# Altium PCB Status_PCB.PcbDoc
Units mm, origin at the board's own origin, x right, y up, seen from the top; angles counter-clockwise.
Board outline 102 x 42 mm, 2 copper layers (Top Layer, Bottom Layer); 18 components, 21 nets, 58 pads, 0 vias.
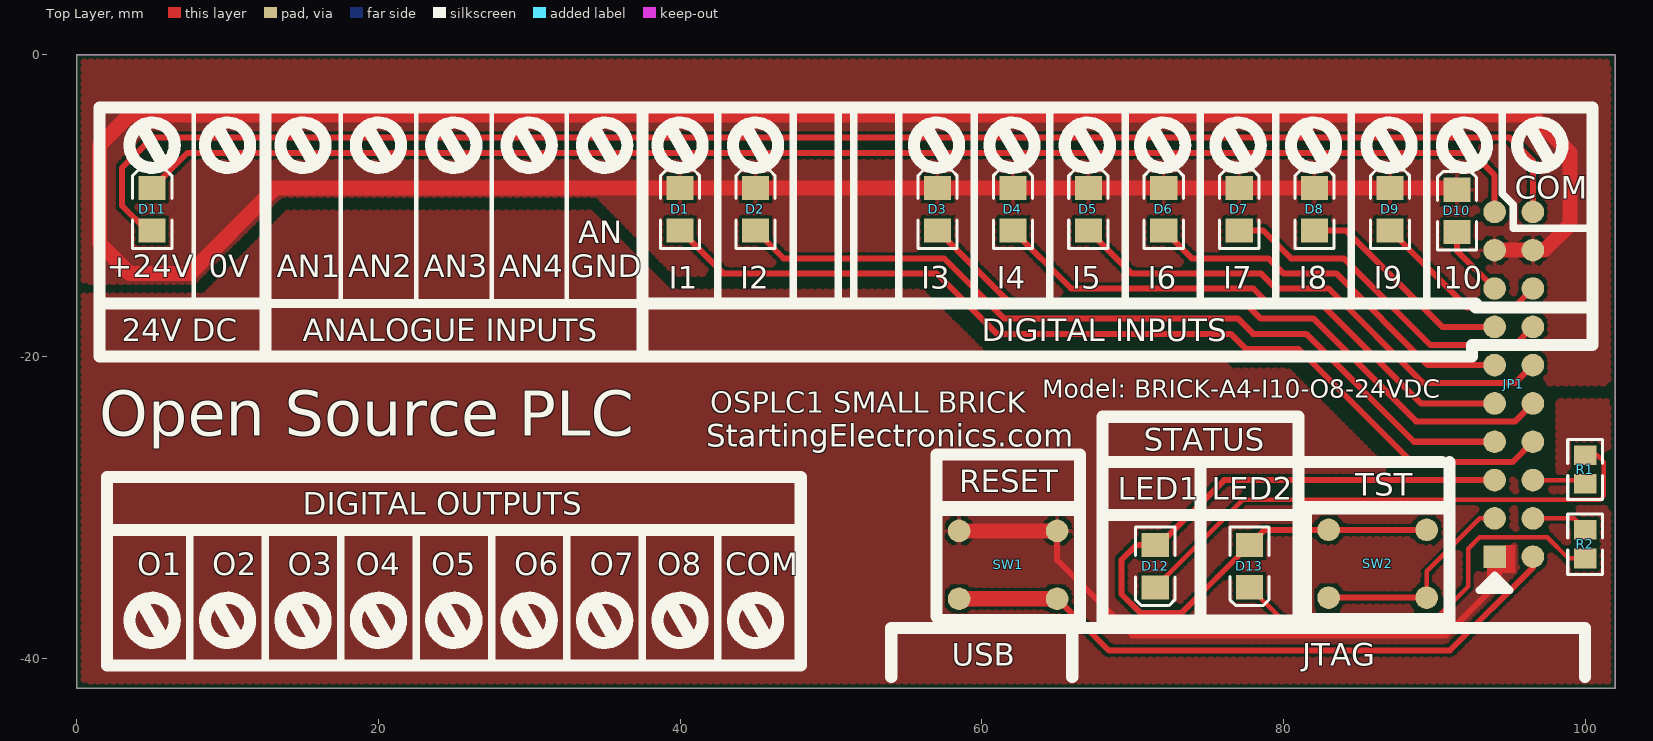
[diagram p0: Top Layer view]
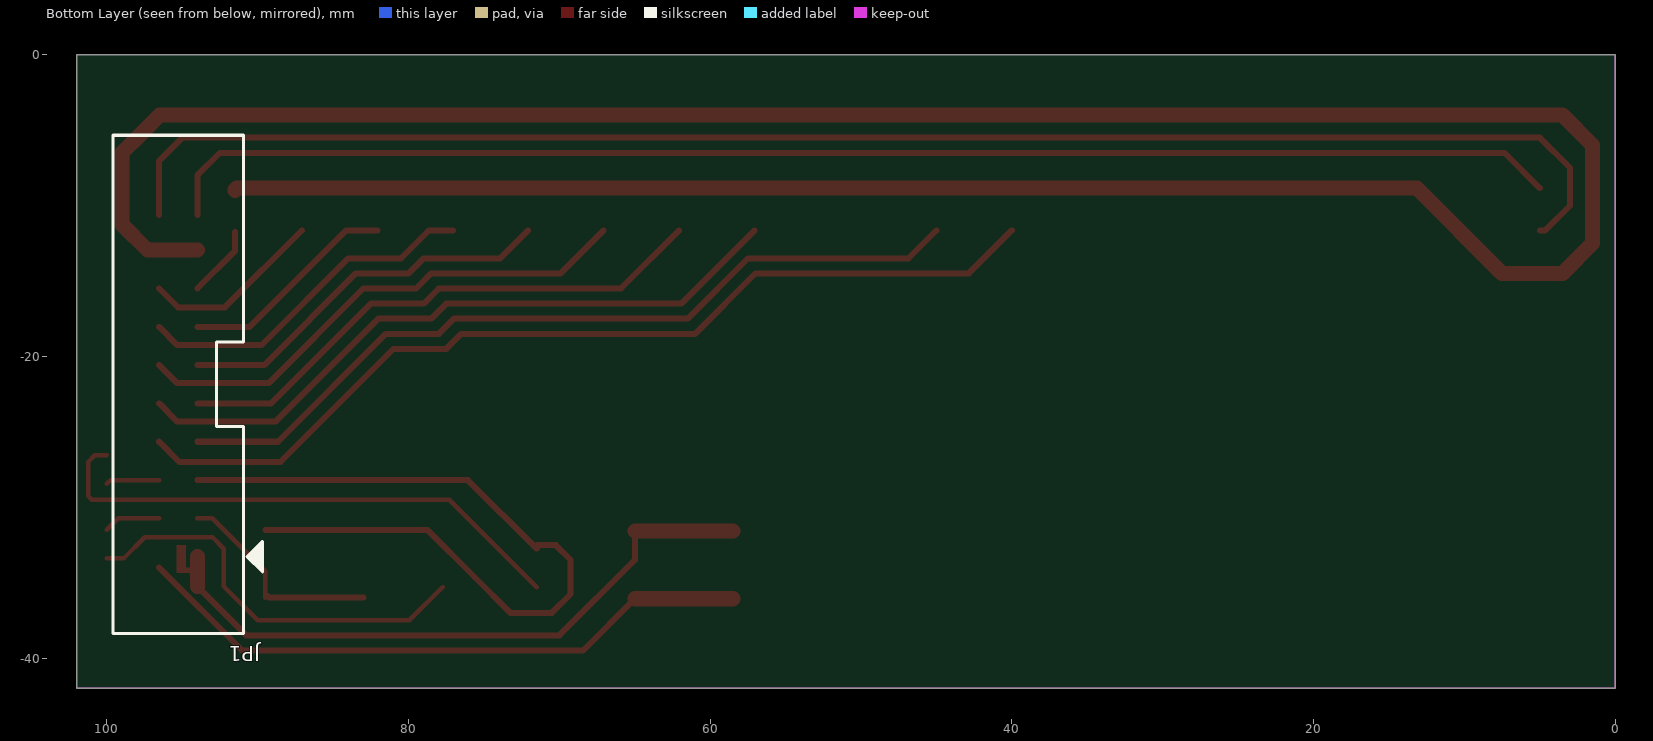
[diagram p1: Bottom Layer view, seen from below]

## Layer stack, top to bottom
Top Layer: signal copper 0.0356
Dielectric: dielectric 0.32, FR-4, Dk 4.8
Bottom Layer: signal copper 0.0356

## Board outline
0,-42 102,-42 102,0 0,0

## Design rules (kind name [scope] priority, off if disabled: settings)
Clearance [All] p1: gap=0.2
ComponentClearance [All] p1: gap=0.254 collisioncheckmode=0
PolygonConnect [All] p1: connectstyle=Relief reliefconductorwidth=0.254 reliefentries=4 polygonreliefangle="90 Angle"
RoutingLayers [All] p1: top layer=Horizontal bottom layer=Vertical
RoutingVias [All] p1: holewidth=0.711 width=1.27 viastyle="Through Hole" minholewidth=0.711 minwidth=1.27 maxholewidth=0.711 maxwidth=1.27
SolderMaskExpansion [All] p1: expansion=0.102
TestPointUsage [All] p1: valid=0 allowmultiple=FALSE
Testpoint [All] p1: side=15 testpointundercomponent=TRUE minsize=1.016 maxsize=2.54 preferedsize=1.524 minholesize=0 maxholesize=1.016 preferedholesize=0.813 testpointgrid=0.025 style=1023 order=-539222988
Width [All] p1: maxlimit=614.865 minlimit=0.2 preferedwidth=1
16 further rules are at their usual default settings.

## Components (designator, comment, footprint, x,y, rotation, side; value= is the part's Value field where it differs from the comment)
D1 "LED" 1206_LED 40,-11.644 r90 top
D2 "LED" 1206_LED 45,-11.644 r90 top
D3 "LED" 1206_LED 57.068,-11.644 r90 top
D4 "LED" 1206_LED 62.068,-11.644 r90 top
D5 "LED" 1206_LED 67.068,-11.644 r90 top
D6 "LED" 1206_LED 72.068,-11.644 r90 top
D7 "LED" 1206_LED 77.068,-11.644 r90 top
D8 "LED" 1206_LED 82.068,-11.644 r90 top
D9 "LED" 1206_LED 87.068,-11.644 r90 top
D10 "LED" 1206_LED 91.5,-11.75 r90 top
D11 "LED" 1206_LED 5,-11.644 r90 top
D12 "LED" 1206_LED 71.5,-32.512 r270 top
D13 "LED" 1206_LED 77.75,-32.5 r270 top
JP1 "IDC20M" IDC_20M_BOX 94,-33.278 r270 bottom
R1 "0805" 0805 100,-28.448 r90 top
R2 "0805" 0805 100,-31.496 r270 top
SW1 "PB_SWITCH_6x6" PB_SW_6x6 65,-36.068 r180 top
SW2 "PB_SWITCH_6x6" PB_SW_6x6 83,-31.496 r0 top

## Footprints (in the part's own frame and the unit in brackets; to place one, negate y for a bottom-side part, rotate by r counter-clockwise, add the part's x,y. Pads: shape width x height; smd on the part's side, far side on the other; paste and mask are expansions set on the pad)
0805 [mm]
  rect 1.3x1.5 smd: 1(0,0) 2(1.9,0)
  silkscreen extent -1.05,-1.15 2.95,1.15
1206_LED [mm]
  rect 1.6x1.8 smd: 1(0,0) 2(2.8,0)
  silkscreen extent -1.2,-1.3 4,1.3
IDC_20M_BOX [mm]
  rect 1.5x1.5 smd far side: 1(0,0)
  round 1.5 smd far side: 2(0,-2.54) 3(-2.54,0) 4(-2.54,-2.54) 5(-5.08,0) 6(-5.08,-2.54) 7(-7.62,0) 8(-7.62,-2.54) 9(-10.16,0) 10(-10.16,-2.54) 11(-12.7,0) 12(-12.7,-2.54) 13(-15.24,0) 14(-15.24,-2.54) 15(-17.78,0) 16(-17.78,-2.54) 17(-20.32,0) 18(-20.32,-2.54) 19(-22.86,0) 20(-22.86,-2.54)
  silkscreen extent -27.94,-5.59 5.08,4.38
PB_SW_6x6 [mm]
  round 1.5 smd: 1(0,0) 2(6.5,0) 3(0,-4.5) 4(6.5,-4.5)
  silkscreen extent -1.2,-5.6 7.7,1.1

## Part data
D1 D2 D3 D4 D5 D6 D7 D8 D9 D10 D11 D12 D13: library part LED_1206, "1206 footpring LED"
JP1: library part IDC_20M, "20 pin IDC male connector, vertical, box"
R1 R2: library part RES_0805, "0805 footprint resistor"
SW1 SW2: "Tact Switch 6mm x 6mm"

## Nets (pads, with @x,y where several pads share a name; then routed paths per layer and width w, separated by ;. In a path a pad name is that pad's centre, name@x,y a point inside that pad or via, vN(x,y) a via of type N, cw(c..) or ccw(c..) an arc to the next point about the centre after c; other vN are vias at no path point)
GND: JP1.1 SW1.3 SW1.4 | length 42.8
  Top Layer w0.4: SW1.3 65,-33.5 70,-38.5 90.75,-38.5 94,-35.25
  Top Layer w1: SW1.4 SW1.3 ; 94,-35.25 JP1.1
IN_GND: D1.2 D2.2 D3.2 D4.2 D5.2 D6.2 D7.2 D8.2 D9.2 D10.2 JP1.17 JP1.18 | length 209.8
  Top Layer w1: D10.2@91.344,-8.844 D10.2@91.5,-9 ; D10.2 91.394,-8.844 D7.2 D6.2 D5.2 D4.2 D3.2 13.156,-8.844 7.5,-14.5 3.5,-14.5 1.5,-12.5 1.5,-6 3.5,-4 96.5,-4 97.678,-5.178 99,-6.5 99,-11.25 97.292,-12.958 JP1.18 JP1.17
LED1: D1.1 JP1.8 | length 63.5
  Top Layer w0.4: D1.1 42.856,-14.5 57,-14.5 61,-18.5 76.5,-18.5 77.5,-19.5 81,-19.5 88.5,-27 95.198,-27 JP1.8
LED2: D2.1 JP1.7 | length 54.8
  Top Layer w0.4: D2.1 46.856,-13.5 57.5,-13.5 61.5,-17.5 77,-17.5 78,-18.5 81.5,-18.5 88.658,-25.658 JP1.7
LED3: D3.1 JP1.10 | length 45.2
  Top Layer w0.4: D3.1 57.213,-11.789 61.924,-16.5 77.5,-16.5 78.5,-17.5 82,-17.5 88.8,-24.3 95.358,-24.3 JP1.10
LED4: D4.1 JP1.9 | length 36.7
  Top Layer w0.4: D4.1 65.924,-15.5 78,-15.5 79,-16.5 82.5,-16.5 89.118,-23.118 JP1.9
LED5: D5.1 JP1.12 | length 34.1
  Top Layer w0.4: D5.1 69.924,-14.5 78.5,-14.5 79.5,-15.5 83,-15.5 89.25,-21.75 95.368,-21.75 JP1.12
LED6: D6.1 JP1.11 | length 25.6
  Top Layer w0.4: D6.1 73.924,-13.5 79,-13.5 80,-14.5 83.5,-14.5 89.578,-20.578 JP1.11
LED7: D7.1 JP1.14 | length 23.1
  Top Layer w0.4: D7.1 78.644,-11.644 80.5,-13.5 84,-13.5 89.75,-19.25 95.328,-19.25 JP1.14
LED8: D8.1 JP1.13 | length 14.6
  Top Layer w0.4: D8.1 84.144,-11.644 90.538,-18.038 JP1.13
LED9: D9.1 JP1.16 | length 12.1
  Top Layer w0.4: D9.1 92.174,-16.75 95.288,-16.75 JP1.16
LED10: D10.1 JP1.15 | length 4.8
  Top Layer w0.4: D10.1 91.5,-12.998 JP1.15
NetD11_1: D11.1 JP1.20 | length 103.8
  Top Layer w0.4: D11.1 4.644,-11.644 3,-10 3,-7.5 5,-5.5 95,-5.5 96.54,-7.04 JP1.20@96.54,-10.64
NetD11_2: D11.2 JP1.19 | length 93.2
  Top Layer w0.4: D11.2 7.344,-6.5 92.5,-6.5 94,-8 JP1.19@94,-10.64
NetD12_1: D12.1 D13.1 JP1.5 SW2.1 SW2.2 | length 52.3
  Top Layer w0.4: D12.1@71.5,-32.75 71.512,-32.75 76.064,-28.198 JP1.5 ; D12.1 70.238,-32.512 69.25,-33.5 69.25,-35.75 70.5,-37 73.25,-37 75.627,-34.623 78.754,-31.496 SW2.2
NetD12_2: D12.2 R1.2 | length 35.9
  Top Layer w0.3: D12.2 77.312,-29.5 101,-29.5 101.25,-29.25 101.25,-27 100.798,-26.548 R1.2
NetD13_2: D13.2 R2.2 | length 27.5
  Top Layer w0.3: D13.2 79.95,-37.5 90,-37.5 92.25,-35.25 92.25,-32.75 93,-32 97.5,-32 98.896,-33.396 R2.2
NetJP1_2: JP1.2 SW1.1 SW1.2 | length 41.7
  Top Layer w0.4: SW1.1 68.432,-39.5 91.04,-39.5 JP1.2@96.54,-34
  Top Layer w1: SW1.2 SW1.1
NetJP1_3: JP1.3 SW2.3 SW2.4 | length 14.1
  Top Layer w0.3: SW2.4 89.5,-34.25 93.012,-30.738 JP1.3
  Top Layer w0.4: SW2.3 89.254,-35.996 SW2.4@89.377,-35.873
NetJP1_4: JP1.4 R2.1 | length 3.8
  Top Layer w0.3: JP1.4 99.242,-30.738 R2.1
NetJP1_6: JP1.6 R1.1 | length 3.6
  Top Layer w0.3: JP1.6 99.75,-28.198 R1.1

## Polygon pours and split planes (outlines as drawn)
GND on Top Layer (hatched 45Degree grid 0 track 0.5): 98.25,-23 98.25,-28.198 87.5,-28.198 80.302,-21 76.5,-21 75.5,-20 60.25,-20 56,-15.75 39.25,-15.75 34,-10.5 14,-10.5 8.5,-16 0.5,-16 0.5,-41.5 101.5,-41.5 101.5,-23
IN_GND on Top Layer (hatched 45Degree grid 0 track 0.5, remove dead copper): 101.5,-21.75 83.273,-21.75 81.023,-19.5 77.5,-19.5 76.5,-18.5 61,-18.5 57,-14.5 39.75,-14.5 34.5,-9.25 13.5,-9.25 11.75,-11 7.75,-15 0.5,-15 0.5,-0.5 101.5,-0.5

## Keep-outs
Keep-Out Layer:
  the board outline again, w0

## Other copper
Top Layer:
  rectangle net GND: 94.75,-34.365 95.377,-32.5
  rectangle net GND: 94.5,-34.365 94.75,-34

## Silkscreen, mask and mechanical layers (free items; w line width, h text height)
Top Overlay:
  drawing of 157 lines, arcs and shapes, not listed
  text "COM" at 95.351,-9.549 h1.5
  text "AN" at 33.25,-12.5 h1.5
  text "+24V" at 2,-14.75 h1.5
  text "0V" at 8.75,-14.75 h1.5
  text "AN1" at 13.25,-14.75 h1.5
  text "AN2" at 18,-14.75 h1.5
  text "AN3" at 23,-14.75 h1.5
  text "AN4" at 28,-14.75 h1.5
  text "GND" at 32.75,-14.75 h1.5
  text "I1" at 39.25,-15.5 h1.5
  text "I2" at 44,-15.5 h1.5
  text "I3" at 56,-15.5 h1.5
  text "I4" at 61,-15.5 h1.5
  text "I5" at 66,-15.5 h1.5
  text "I6" at 71,-15.5 h1.5
  text "I7" at 76,-15.5 h1.5
  text "I8" at 81,-15.5 h1.5
  text "I9" at 86,-15.5 h1.5
  text "I10" at 90,-15.5 h1.5
  text "24V DC" at 3,-19 h1.5
  text "ANALOGUE INPUTS" at 15,-19 h1.5
  text "DIGITAL INPUTS" at 60,-19 h1.5
  text "Model: BRICK-A4-I10-O8-24VDC" at 64,-22.75 h1.2
  text "OSPLC1 SMALL BRICK" at 42,-23.75 h1.4
  text "Open Source PLC" at 1.5,-25.25 h3
  text "StartingElectronics.com" at 41.75,-26 h1.5
  text "STATUS" at 70.75,-26.25 h1.5
  text "RESET" at 58.5,-29 h1.5
  text "TST" at 84.75,-29.25 h1.5
  text "LED1" at 69,-29.5 h1.5
  text "LED2" at 75.25,-29.5 h1.5
  text "DIGITAL OUTPUTS" at 15,-30.5 h1.5
  text "O1" at 4,-34.5 h1.5
  text "O2" at 9,-34.5 h1.5
  text "O3" at 14,-34.5 h1.5
  text "O4" at 18.5,-34.5 h1.5
  text "O5" at 23.5,-34.5 h1.5
  text "O6" at 29,-34.5 h1.5
  text "O7" at 34,-34.5 h1.5
  text "O8" at 38.5,-34.5 h1.5
  text "COM" at 43,-34.5 h1.5
  text "USB" at 58,-40.5 h1.5
  text "JTAG" at 81.25,-40.5 h1.5
Drill Drawing:
  text ".LEGEND" at 107.08,-36.92 h1.52
  text "Drill Drawing." at 107.08,-39.46 h1.52

## Dimensions
0,-42 to 102,-42 on Mechanical 1
0,-42 to 0,0 on Mechanical 1